# Altium PCB MEA_60_6MIL.PcbDoc
Units mil, origin at the board's own origin, x right, y up, seen from the top; angles counter-clockwise.
Board outline 2200 x 2200 mil, 2 copper layers (Top Copper Layer, Bottom Copper Layer), stack 42.126 mil thick; 1 components, 68 nets, 136 pads, 68 vias.
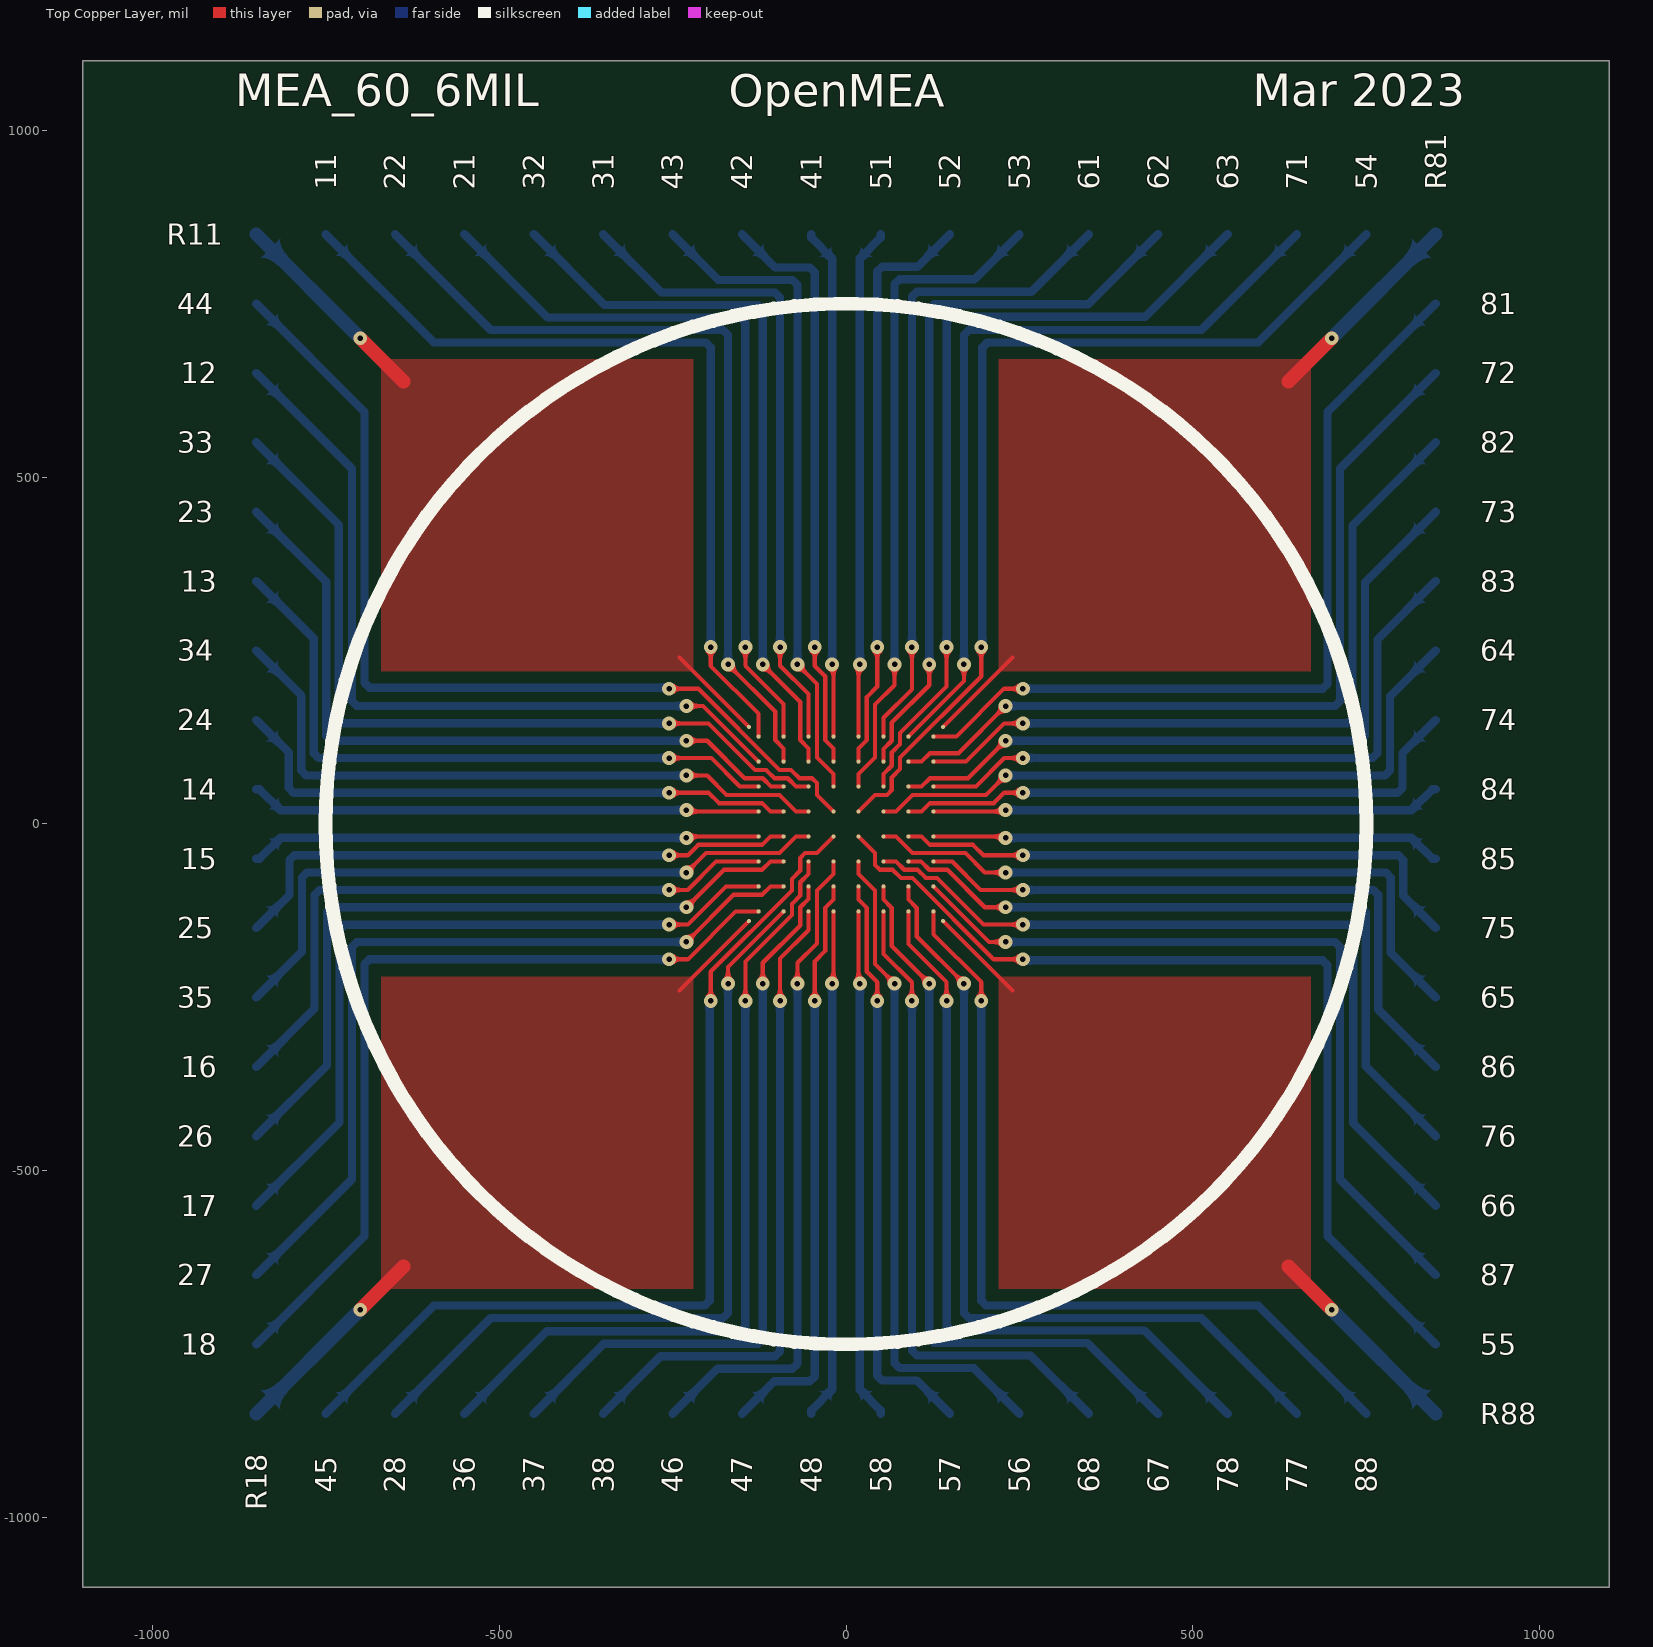
[diagram p0: Top Copper Layer view]
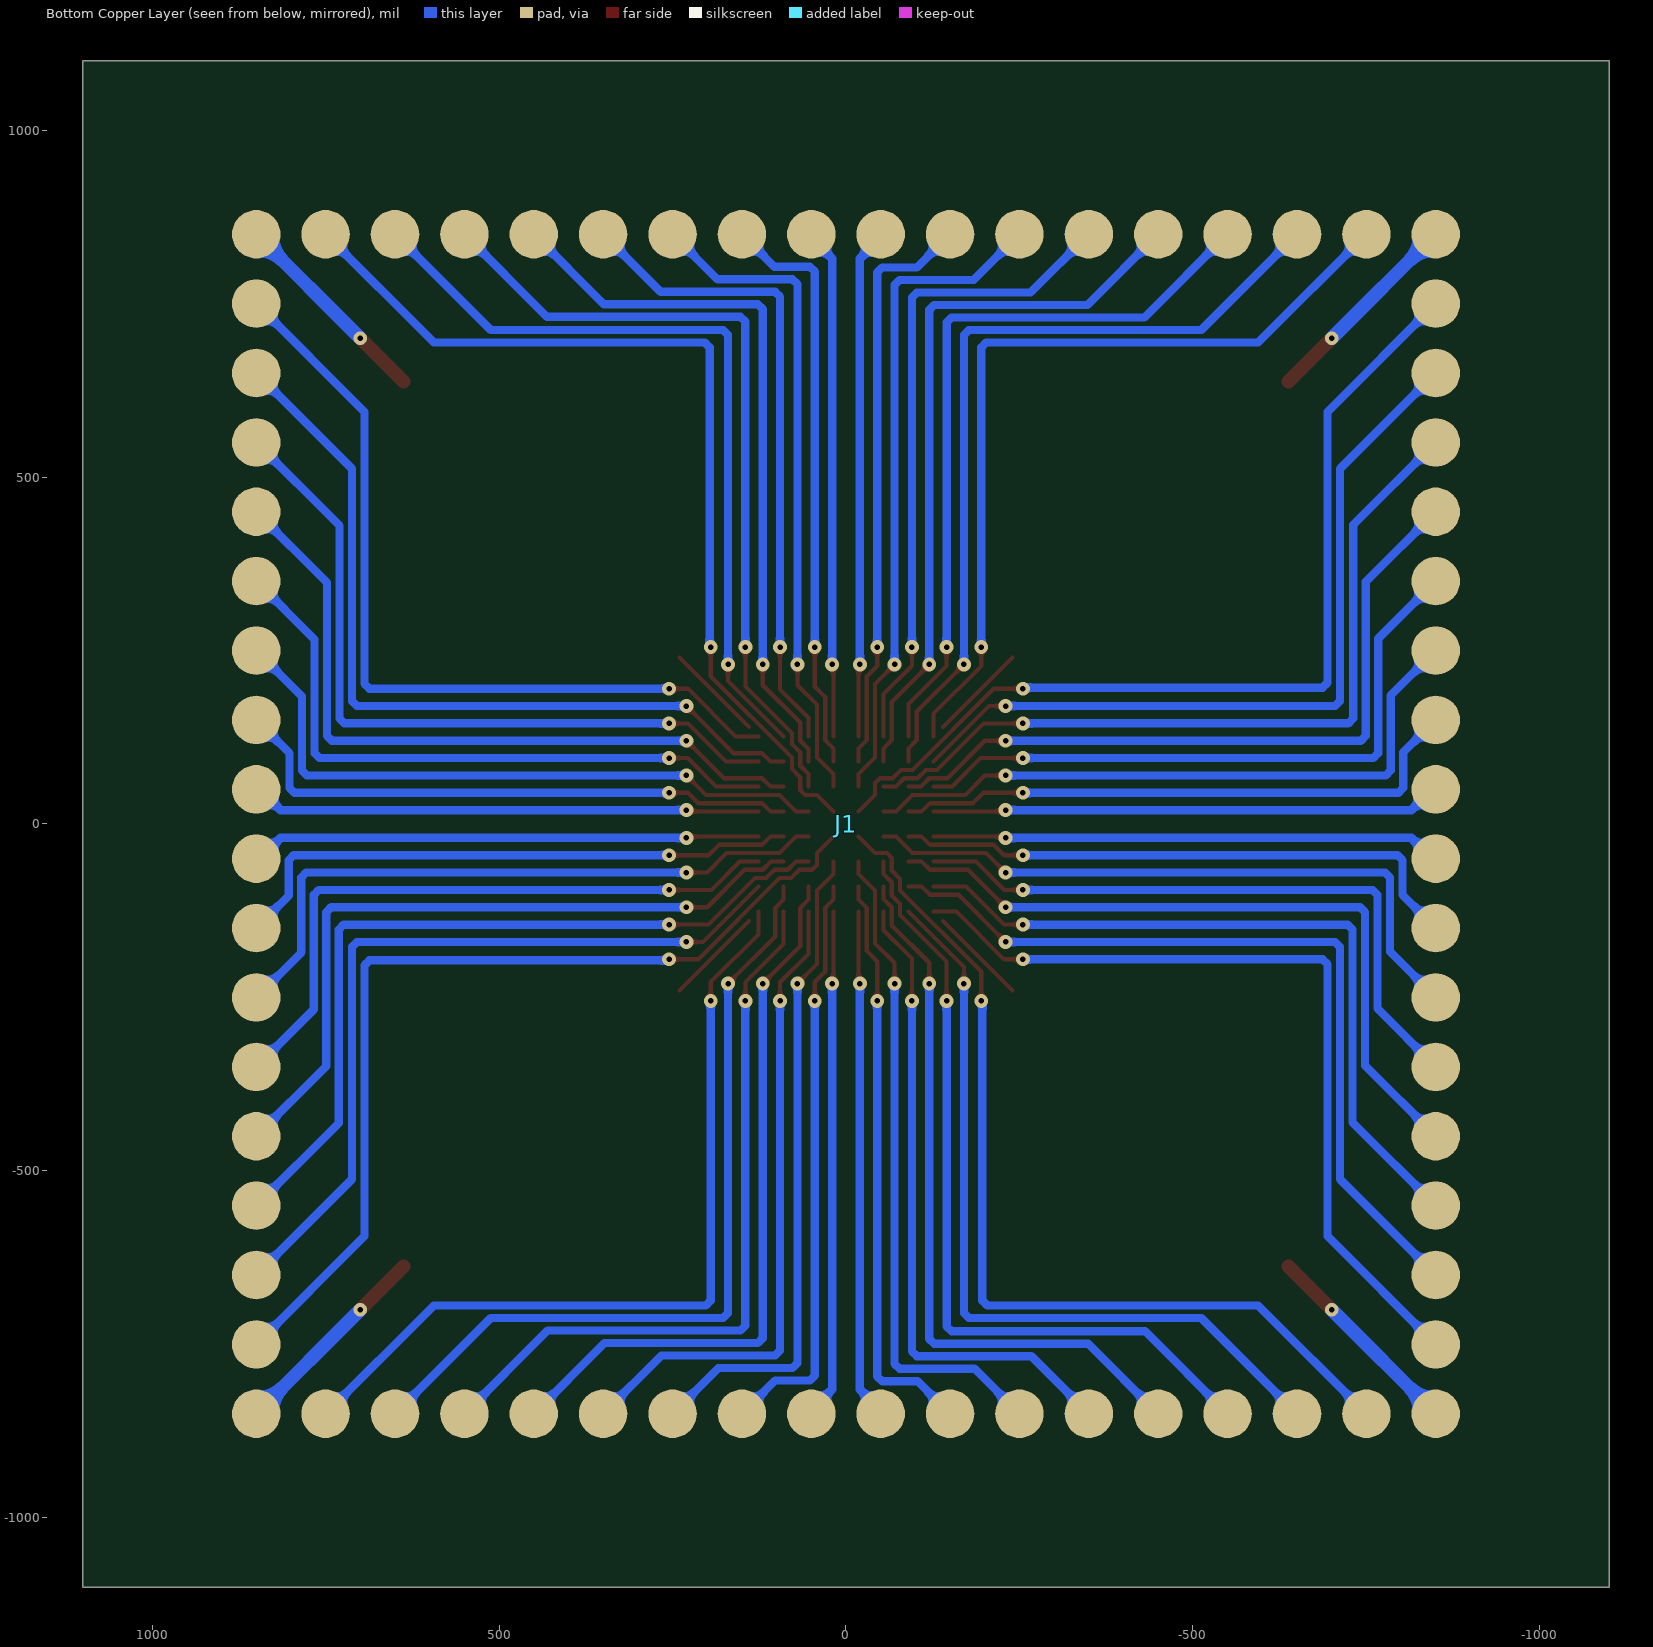
[diagram p1: Bottom Copper Layer view, seen from below]

## Layer stack, top to bottom
Top Solder: solder mask 0.394, Solder Resist, Dk 3.5
Top Copper Layer: signal copper 1.378
Dielectric 1: core 39.37, FR-4, Dk 4.2
Bottom Copper Layer: signal copper 1.378
Bottom Solder: solder mask 0.394, Solder Resist, Dk 3.5

## Board outline
-1100,1100 -1100,-1100 1100,-1100 1100,1100

## Design rules (kind name [scope] priority, off if disabled: settings)
BoardOutlineClearance [All] p1: gap=15.75 ignorepadtopadclearanceinfootprint=FALSE
Clearance [All] p1: gap=6 ignorepadtopadclearanceinfootprint=TRUE
ComponentClearance [All] p1: gap=5.91 collisioncheckmode=3 verticalgap=5.91 showdistances=FALSE
HoleSize [All] p1: absolutevalues=TRUE maxlimit=30 minlimit=8 maxpercent=80.000 minpercent=20.000
HoleToHoleClearance [All] p1: gap=17.72 allowstackedmicrovias=TRUE
MinimumAnnularRing [All] p1: minimumring=6
MinimumSolderMaskSliver [All] p1: minsoldermaskwidth=5.91
PlaneClearance [All] p1: clearance=5.91
PlaneConnect [All] p1: planeconnectstyle=Relief reliefexpansion=9.84 reliefentries=4 reliefconductorwidth=5.91 reliefairgap=5.91
PolygonConnect [All] p1: connectstyle=Direct reliefconductorwidth=5.91 reliefentries=4 polygonreliefangle="90 Angle" airgapwidth=5.91
RoomDefinition MEA_60_6MIL [InComponentClass('MEA_60_6MIL')] p1 off: confinementstyle=ConfineIn formatcopy=TRUE lockcomponents=FALSE outline -972,-977.13 1028,-977.13 1028,22.87 -972,22.87
RoutingVias [All] p1: holewidth=8 width=20 viastyle="Through Hole" minholewidth=8 minwidth=20 maxholewidth=15.75 maxwidth=31.5
SilkToSilkClearance [All] p1: silktosilkclearance=7.87
SilkToSolderMaskClearance [IsPad] p1: minsilkscreentomaskgap=7.87 clearancetoexposedcopper=TRUE
SolderMaskExpansion [All] p1: expansion=4 istentingtop=FALSE
Width [All] p1: maxlimit=20 minlimit=6 preferedwidth=6
22 further rules are at their usual default settings.

## Components (designator, comment, footprint, x,y, rotation, side; value= is the part's Value field where it differs from the comment)
J1 "Pogo_Pins_64_4" Pogo_Pins_64_4 0,0 r0 top locked

## Footprints (in the part's own frame and the unit in brackets; to place one, negate y for a bottom-side part, rotate by r counter-clockwise, add the part's x,y. Pads: shape width x height; smd on the part's side, far side on the other; paste and mask are expansions set on the pad)
Pogo_Pins_64_4 [mil]
  round 70 smd far side: 11(-750,850) 12(-850,650) 13(-850,350) 14(-850,50) 15(-850,-50) 16(-850,-350) 17(-850,-550) 18(-850,-750) 21(-550,850) 22(-650,850) 23(-850,450) 24(-850,150) 25(-850,-150) 26(-850,-450) 27(-850,-650) 28(-650,-850) 31(-350,850) 32(-450,850) 33(-850,550) 34(-850,250) 35(-850,-250) 36(-550,-850) 37(-450,-850) 38(-350,-850) 41(-50,850) 42(-150,850) 43(-250,850) 44(-850,750) 45(-750,-850) 46(-250,-850) 47(-150,-850) 48(-50,-850) 51(50,850) 52(150,850) 53(250,850) 54(750,850) 55(850,-750) 56(250,-850) 57(150,-850) 58(50,-850) 61(350,850) 62(450,850) 63(550,850) 64(850,250) 65(850,-250) 66(850,-550) 67(450,-850) 68(350,-850) 71(650,850) 72(850,650) 73(850,450) 74(850,150) 75(850,-150) 76(850,-450) 77(650,-850) 78(550,-850) 81(850,750) 82(850,550) 83(850,350) 84(850,50) 85(850,-50) 86(850,-350) 87(850,-650) 88(750,-850) R11(-850,850) R18(-850,-850) R81(850,850) R88(850,-850)

## Part data
J1: "Pogo pins, 64 recording electrodes, 4 reference electrodes"

## Free pads (board coordinates)
  round 6 smd mask+0: 1(-140,-140) 1(-140,140) 1(-126,-126) 1(-126,-90) 1(-126,-54) 1(-126,-18) 1(-126,18) 1(-126,54) 1(-126,90) 1(-126,126) 1(-90,-126) 1(-90,-90) 1(-90,-54) 1(-90,-18) 1(-90,18) 1(-90,54) 1(-90,90) 1(-90,126) 1(-54,-126) 1(-54,-90) 1(-54,-54) 1(-54,-18) 1(-54,18) 1(-54,54) 1(-54,90) 1(-54,126) 1(-18,-126) 1(-18,-90) 1(-18,-54) 1(-18,-18) 1(-18,18) 1(-18,54) 1(-18,90) 1(-18,126) 1(18,-126) 1(18,-90) 1(18,-54) 1(18,-18) 1(18,18) 1(18,54) 1(18,90) 1(18,126) 1(54,-126) 1(54,-90) 1(54,-54) 1(54,-18) 1(54,18) 1(54,54) 1(54,90) 1(54,126) 1(90,-126) 1(90,-90) 1(90,-54) 1(90,-18) 1(90,18) 1(90,54) 1(90,90) 1(90,126) 1(126,-126) 1(126,-90) 1(126,-54) 1(126,-18) 1(126,18) 1(126,54) 1(126,90) 1(126,126) 1(140,-140) 1(140,140)

## Via types
v1: diameter 20, hole 8, Top Copper Layer to Bottom Copper Layer, tented both sides, 68 vias

## Nets (pads, with @x,y where several pads share a name; then routed paths per layer and width w, separated by ;. In a path a pad name is that pad's centre, name@x,y a point inside that pad or via, vN(x,y) a via of type N, cw(c..) or ccw(c..) an arc to the next point about the centre after c; other vN are vias at no path point)
E11: J1.11 pad.1@-126,126 | length 1212.1
  Top Copper Layer w6: v1(-195,255) -195,228 -126,159 pad.1@-126,126
  Bottom Copper Layer w12: J1.11 -594,694 -202.03,694 -195,686.97 v1(-195,255)
E12: J1.12 pad.1@-126,90 | length 1152.2
  Top Copper Layer w6: v1(-230,170) -206.16,170 -126.16,90 pad.1@-126,90
  Bottom Copper Layer w12: J1.12 -712,512 -712,177.03 -704.97,170 v1(-230,170)
E13: J1.13 pad.1@-126,54 | length 943.2
  Top Copper Layer w6: v1(-255,95) -194.11,95 -153.11,54 pad.1@-126,54
  Bottom Copper Layer w12: J1.13 -767,267 -767,102.03 -759.97,95 v1(-255,95)
E14: J1.14 pad.1@-126,18 | length 735.3
  Top Copper Layer w6: v1(-230,20) -228,18 pad.1@-126,18
  Bottom Copper Layer w12: J1.14 -844.99,50 -814.99,20 -276,20 ; -274,20 v1(-230,20)
E15: J1.15 pad.1@-126,-18 | length 737.3
  Top Copper Layer w6: v1(-230,-20) -228,-18 pad.1@-126,-18
  Bottom Copper Layer w12: J1.15 -844.99,-50 -814.99,-20 v1(-230,-20)
E16: J1.16 pad.1@-126,-54 | length 942.7
  Top Copper Layer w6: v1(-255,-95) -228.13,-95 -187.13,-54 pad.1@-126,-54
  Bottom Copper Layer w12: J1.16 -766,-266 -766,-102.03 -758.97,-95 v1(-255,-95)
E17: J1.17 pad.1@-126,-90 | length 1077.4
  Top Copper Layer w6: v1(-255,-145) -228,-145 -173,-90 pad.1@-126,-90
  Bottom Copper Layer w12: J1.17 -730,-430 -730,-152.03 -722.97,-145 v1(-255,-145)
E18: J1.18 pad.1@-126,-126 | length 1212.1
  Top Copper Layer w6: v1(-255,-195) -228,-195 -159,-126 pad.1@-126,-126
  Bottom Copper Layer w12: J1.18 -694,-594 -694,-202.03 -686.97,-195 v1(-255,-195)
E21: J1.21 pad.1@-90,126 | length 1077.4
  Top Copper Layer w6: v1(-145,255) -145,228 -90,173 pad.1@-90,126
  Bottom Copper Layer w12: J1.21 -430,730 -152.03,730 -145,722.97 v1(-145,255)
E22: J1.22 pad.1@-90,90 | length 1188.2
  Top Copper Layer w6: v1(-170,230) -102,162 -102,121.03 -90,109.03 pad.1@-90,90
  Bottom Copper Layer w12: J1.22 -512,712 -177.03,712 -170,704.97 v1(-170,230)
E23: J1.23 pad.1@-90,54 | length 1054.1
  Top Copper Layer w6: v1(-230,120) -200,120 -146,66 -120,66 -108,54 pad.1@-90,54
  Bottom Copper Layer w12: J1.23 -749,349 -749,127.03 -741.97,120 v1(-230,120)
E24: J1.24 pad.1@-90,18 | length 844.5
  Top Copper Layer w6: v1(-255,45) -198.13,45 -183.13,30 -130.97,30 -121.03,30 -109.03,18 pad.1@-90,18
  Bottom Copper Layer w12: J1.24 -803,103 -803,52.03 -795.97,45 v1(-255,45)
E25: J1.25 pad.1@-90,-18 | length 843.9
  Top Copper Layer w6: v1(-255,-45) -228,-45 -213,-30 -121,-30 -109,-18 pad.1@-90,-18
  Bottom Copper Layer w12: J1.25 -802,-102 -802,-52.03 -794.97,-45 v1(-255,-45)
E26: J1.26 pad.1@-90,-54 | length 1053.5
  Top Copper Layer w6: v1(-230,-120) -176,-66 -121,-66 -109,-54 pad.1@-90,-54
  Bottom Copper Layer w12: J1.26 -748,-348 -748,-127.03 -740.97,-120 v1(-230,-120)
E27: J1.27 pad.1@-90,-90 | length 1188.2
  Top Copper Layer w6: v1(-230,-170) -162,-102 -121.03,-102 -109.03,-90 pad.1@-90,-90
  Bottom Copper Layer w12: J1.27 -712,-512 -712,-177.03 -704.97,-170 v1(-230,-170)
E28: J1.28 pad.1@-90,-126 | length 1152.2
  Top Copper Layer w6: v1(-170,-230) -170,-206.16 -90,-126.16 pad.1@-90,-126
  Bottom Copper Layer w12: J1.28 -512,-712 -177.03,-712 -170,-704.97 v1(-170,-230)
E31: J1.31 pad.1@-54,126 | length 942.7
  Top Copper Layer w6: v1(-95,255) -95,228.13 -54,187.13 pad.1@-54,126
  Bottom Copper Layer w12: J1.31 -266,766 -102.03,766 -95,758.97 v1(-95,255)
E32: J1.32 pad.1@-54,90 | length 1053.5
  Top Copper Layer w6: v1(-120,230) -66,176 -66,121 -54,109 pad.1@-54,90
  Bottom Copper Layer w12: J1.32 -348,748 -127.03,748 -120,740.97 v1(-120,230)
E33: J1.33 pad.1@-54,54 | length 1164.9
  Top Copper Layer w6: v1(-255,145) -198.13,145 -131.13,78 -115.03,78 -103.03,66 -84,66 -72,54 pad.1@-54,54
  Bottom Copper Layer w12: J1.33 -731,431 -731,152.03 -723.97,145 v1(-255,145)
E34: J1.34 pad.1@-54,18 | length 955.3
  Top Copper Layer w6: v1(-230,70) -200,70 -172,42 -96,42 -72,18 pad.1@-54,18
  Bottom Copper Layer w12: J1.34 -785,185 -785,77.03 -777.97,70 v1(-230,70)
E35: J1.35 pad.1@-54,-18 | length 954.8
  Top Copper Layer w6: v1(-230,-70) -202,-42 -116.03,-42 -96,-42 -72,-18 pad.1@-54,-18
  Bottom Copper Layer w12: J1.35 -784,-184 -784,-77.03 -776.97,-70 v1(-230,-70)
E36: J1.36 pad.1@-54,-54 | length 1164.9
  Top Copper Layer w6: v1(-145,-255) -145,-198.13 -78,-131.13 -78,-115.03 -66,-103.03 -66,-84 -54,-72 pad.1@-54,-54
  Bottom Copper Layer w12: J1.36 -431,-731 -152.03,-731 -145,-723.97 v1(-145,-255)
E37: J1.37 pad.1@-54,-90 | length 1054.1
  Top Copper Layer w6: v1(-120,-230) -120,-200 -66,-146 -66,-120 -54,-108 pad.1@-54,-90
  Bottom Copper Layer w12: J1.37 -349,-749 -127.03,-749 -120,-741.97 v1(-120,-230)
E38: J1.38 pad.1@-54,-126 | length 943.2
  Top Copper Layer w6: v1(-95,-255) -95,-194.11 -54,-153.11 pad.1@-54,-126
  Bottom Copper Layer w12: J1.38 -267,-767 -102.03,-767 -95,-759.97 v1(-95,-255)
E41: J1.41 pad.1@-18,126 | length 737.3
  Top Copper Layer w6: v1(-20,230) -18,228 pad.1@-18,126
  Bottom Copper Layer w12: J1.41 -50,844.99 -20,814.99 v1(-20,230)
E42: J1.42 pad.1@-18,90 | length 843.9
  Top Copper Layer w6: v1(-45,255) -45,228 -30,213 -30,121 -18,109 pad.1@-18,90
  Bottom Copper Layer w12: J1.42 -102,802 -52.03,802 -45,794.97 v1(-45,255)
E43: J1.43 pad.1@-18,54 | length 954.8
  Top Copper Layer w6: v1(-70,230) -42,202 -42,116.03 -42,96 -18,72 pad.1@-18,54
  Bottom Copper Layer w12: J1.43 -184,784 -77.03,784 -70,776.97 v1(-70,230)
E44: J1.44 pad.1@-18,18 | length 1373.9
  Top Copper Layer w6: v1(-255,195) -213,195 -96,78 -79.03,78 -67.03,66 -49.03,66 -42,58.97 -42,42 pad.1@-18,18
  Bottom Copper Layer w12: J1.44 -694,594 -694,203.56 -686.97,196.53 -256.53,196.53 v1(-255,195)
E45: J1.45 pad.1@-18,-18 | length 1373.9
  Top Copper Layer w6: v1(-195,-255) -195,-213 -78,-96 -78,-79.03 -66,-67.03 -66,-49.03 -58.97,-42 -42,-42 pad.1@-18,-18
  Bottom Copper Layer w12: J1.45 -594,-694 -203.56,-694 -196.53,-686.97 -196.53,-256.53 v1(-195,-255)
E46: J1.46 pad.1@-18,-54 | length 955.3
  Top Copper Layer w6: v1(-70,-230) -70,-200 -42,-172 -42,-96 -18,-72 pad.1@-18,-54
  Bottom Copper Layer w12: J1.46 -185,-785 -77.03,-785 -70,-777.97 v1(-70,-230)
E47: J1.47 pad.1@-18,-90 | length 844.5
  Top Copper Layer w6: v1(-45,-255) -45,-198.13 -30,-183.13 -30,-130.97 -30,-121.03 -18,-109.03 pad.1@-18,-90
  Bottom Copper Layer w12: J1.47 -103,-803 -52.03,-803 -45,-795.97 v1(-45,-255)
E48: J1.48 pad.1@-18,-126 | length 735.3
  Top Copper Layer w6: v1(-20,-230) -18,-228 pad.1@-18,-126
  Bottom Copper Layer w12: J1.48 -50,-844.99 -20,-814.99 -20,-276 ; -20,-274 v1(-20,-230)
E51: J1.51 pad.1@18,126 | length 735.3
  Top Copper Layer w6: pad.1@18,126 18,228 v1(20,230)
  Bottom Copper Layer w12: v1(20,230) 20,274 ; 20,276 20,814.99 50,844.99 J1.51
E52: J1.52 pad.1@18,90 | length 844.5
  Top Copper Layer w6: pad.1@18,90 18,109.03 30,121.03 30,130.97 30,183.13 45,198.13 v1(45,255)
  Bottom Copper Layer w12: v1(45,255) 45,795.97 52.03,803 103,803 J1.52
E53: J1.53 pad.1@18,54 | length 955.3
  Top Copper Layer w6: pad.1@18,54 18,72 42,96 42,172 70,200 v1(70,230)
  Bottom Copper Layer w12: v1(70,230) 70,777.97 77.03,785 185,785 J1.53
E54: J1.54 pad.1@18,18 | length 1373.9
  Top Copper Layer w6: pad.1@18,18 42,42 58.97,42 66,49.03 66,67.03 78,79.03 78,96 195,213 v1(195,255)
  Bottom Copper Layer w12: v1(195,255) 196.53,256.53 196.53,686.97 203.56,694 594,694 J1.54
E55: J1.55 pad.1@18,-18 | length 1373.9
  Top Copper Layer w6: pad.1@18,-18 42,-42 42,-58.97 49.03,-66 67.03,-66 79.03,-78 96,-78 213,-195 v1(255,-195)
  Bottom Copper Layer w12: v1(255,-195) 256.53,-196.53 686.97,-196.53 694,-203.56 694,-594 J1.55
E56: J1.56 pad.1@18,-54 | length 954.8
  Top Copper Layer w6: pad.1@18,-54 18,-72 42,-96 42,-116.03 42,-202 v1(70,-230)
  Bottom Copper Layer w12: v1(70,-230) 70,-776.97 77.03,-784 184,-784 J1.56
E57: J1.57 pad.1@18,-90 | length 843.9
  Top Copper Layer w6: pad.1@18,-90 18,-109 30,-121 30,-213 45,-228 v1(45,-255)
  Bottom Copper Layer w12: v1(45,-255) 45,-794.97 52.03,-802 102,-802 J1.57
E58: J1.58 pad.1@18,-126 | length 737.3
  Top Copper Layer w6: pad.1@18,-126 18,-228 v1(20,-230)
  Bottom Copper Layer w12: v1(20,-230) 20,-814.99 50,-844.99 J1.58
E61: J1.61 pad.1@54,126 | length 943.2
  Top Copper Layer w6: pad.1@54,126 54,153.11 95,194.11 v1(95,255)
  Bottom Copper Layer w12: v1(95,255) 95,759.97 102.03,767 267,767 J1.61
E62: J1.62 pad.1@54,90 | length 1054.1
  Top Copper Layer w6: pad.1@54,90 54,108 66,120 66,146 120,200 v1(120,230)
  Bottom Copper Layer w12: v1(120,230) 120,741.97 127.03,749 349,749 J1.62
E63: J1.63 pad.1@54,54 | length 1164.9
  Top Copper Layer w6: pad.1@54,54 54,72 66,84 66,103.03 78,115.03 78,131.13 145,198.13 v1(145,255)
  Bottom Copper Layer w12: v1(145,255) 145,723.97 152.03,731 431,731 J1.63
E64: J1.64 pad.1@54,18 | length 954.8
  Top Copper Layer w6: pad.1@54,18 72,18 96,42 116.03,42 202,42 v1(230,70)
  Bottom Copper Layer w12: v1(230,70) 776.97,70 784,77.03 784,184 J1.64
E65: J1.65 pad.1@54,-18 | length 955.3
  Top Copper Layer w6: pad.1@54,-18 72,-18 96,-42 172,-42 200,-70 v1(230,-70)
  Bottom Copper Layer w12: v1(230,-70) 777.97,-70 785,-77.03 785,-185 J1.65
E66: J1.66 pad.1@54,-54 | length 1164.9
  Top Copper Layer w6: pad.1@54,-54 72,-54 84,-66 103.03,-66 115.03,-78 131.13,-78 198.13,-145 v1(255,-145)
  Bottom Copper Layer w12: v1(255,-145) 723.97,-145 731,-152.03 731,-431 J1.66
E67: J1.67 pad.1@54,-90 | length 1053.5
  Top Copper Layer w6: pad.1@54,-90 54,-109 66,-121 66,-176 v1(120,-230)
  Bottom Copper Layer w12: v1(120,-230) 120,-740.97 127.03,-748 348,-748 J1.67
E68: J1.68 pad.1@54,-126 | length 942.7
  Top Copper Layer w6: pad.1@54,-126 54,-187.13 95,-228.13 v1(95,-255)
  Bottom Copper Layer w12: v1(95,-255) 95,-758.97 102.03,-766 266,-766 J1.68
E71: J1.71 pad.1@90,126 | length 1152.2
  Top Copper Layer w6: pad.1@90,126 90,126.16 170,206.16 v1(170,230)
  Bottom Copper Layer w12: v1(170,230) 170,704.97 177.03,712 512,712 J1.71
E72: J1.72 pad.1@90,90 | length 1188.2
  Top Copper Layer w6: pad.1@90,90 109.03,90 121.03,102 162,102 v1(230,170)
  Bottom Copper Layer w12: v1(230,170) 704.97,170 712,177.03 712,512 J1.72
E73: J1.73 pad.1@90,54 | length 1053.5
  Top Copper Layer w6: pad.1@90,54 109,54 121,66 176,66 v1(230,120)
  Bottom Copper Layer w12: v1(230,120) 740.97,120 748,127.03 748,348 J1.73
E74: J1.74 pad.1@90,18 | length 843.9
  Top Copper Layer w6: pad.1@90,18 109,18 121,30 213,30 228,45 v1(255,45)
  Bottom Copper Layer w12: v1(255,45) 794.97,45 802,52.03 802,102 J1.74
E75: J1.75 pad.1@90,-18 | length 844.5
  Top Copper Layer w6: pad.1@90,-18 109.03,-18 121.03,-30 130.97,-30 183.13,-30 198.13,-45 v1(255,-45)
  Bottom Copper Layer w12: v1(255,-45) 795.97,-45 803,-52.03 803,-103 J1.75
E76: J1.76 pad.1@90,-54 | length 1054.1
  Top Copper Layer w6: pad.1@90,-54 108,-54 120,-66 146,-66 200,-120 v1(230,-120)
  Bottom Copper Layer w12: v1(230,-120) 741.97,-120 749,-127.03 749,-349 J1.76
E77: J1.77 pad.1@90,-90 | length 1188.2
  Top Copper Layer w6: pad.1@90,-90 90,-109.03 102,-121.03 102,-162 v1(170,-230)
  Bottom Copper Layer w12: v1(170,-230) 170,-704.97 177.03,-712 512,-712 J1.77
E78: J1.78 pad.1@90,-126 | length 1077.4
  Top Copper Layer w6: pad.1@90,-126 90,-173 145,-228 v1(145,-255)
  Bottom Copper Layer w12: v1(145,-255) 145,-722.97 152.03,-730 430,-730 J1.78
E81: J1.81 pad.1@126,126 | length 1212.1
  Top Copper Layer w6: pad.1@126,126 159,126 228,195 v1(255,195)
  Bottom Copper Layer w12: v1(255,195) 686.97,195 694,202.03 694,594 J1.81
E82: J1.82 pad.1@126,90 | length 1077.4
  Top Copper Layer w6: pad.1@126,90 173,90 228,145 v1(255,145)
  Bottom Copper Layer w12: v1(255,145) 722.97,145 730,152.03 730,430 J1.82
E83: J1.83 pad.1@126,54 | length 942.7
  Top Copper Layer w6: pad.1@126,54 187.13,54 228.13,95 v1(255,95)
  Bottom Copper Layer w12: v1(255,95) 758.97,95 766,102.03 766,266 J1.83
E84: J1.84 pad.1@126,18 | length 737.3
  Top Copper Layer w6: pad.1@126,18 228,18 v1(230,20)
  Bottom Copper Layer w12: v1(230,20) 814.99,20 844.99,50 J1.84
E85: J1.85 pad.1@126,-18 | length 735.3
  Top Copper Layer w6: pad.1@126,-18 228,-18 v1(230,-20)
  Bottom Copper Layer w12: v1(230,-20) 274,-20 ; 276,-20 814.99,-20 844.99,-50 J1.85
E86: J1.86 pad.1@126,-54 | length 943.2
  Top Copper Layer w6: pad.1@126,-54 153.11,-54 194.11,-95 v1(255,-95)
  Bottom Copper Layer w12: v1(255,-95) 759.97,-95 767,-102.03 767,-267 J1.86
E87: J1.87 pad.1@126,-90 | length 1152.2
  Top Copper Layer w6: pad.1@126,-90 126.16,-90 206.16,-170 v1(230,-170)
  Bottom Copper Layer w12: v1(230,-170) 704.97,-170 712,-177.03 712,-512 J1.87
E88: J1.88 pad.1@126,-126 | length 1212.1
  Top Copper Layer w6: pad.1@126,-126 126,-159 195,-228 v1(195,-255)
  Bottom Copper Layer w12: v1(195,-255) 195,-686.97 202.03,-694 594,-694 J1.88
R11: J1.R11 pad.1@-140,140 | length 441.2
  Top Copper Layer w6: -240,240 pad.1@-140,140
  Top Copper Layer w20: v1(-700,700) -638,638
  Bottom Copper Layer w20: J1.R11 v1(-700,700)
R18: J1.R18 pad.1@-140,-140 | length 441.2
  Top Copper Layer w6: -240,-240 pad.1@-140,-140
  Top Copper Layer w20: v1(-700,-700) -638,-638
  Bottom Copper Layer w20: J1.R18 v1(-700,-700)
R81: J1.R81 pad.1@140,140 | length 441.2
  Top Copper Layer w6: pad.1@140,140 240,240
  Top Copper Layer w20: 638,638 v1(700,700)
  Bottom Copper Layer w20: v1(700,700) J1.R81
R88: J1.R88 pad.1@140,-140 | length 441.2
  Top Copper Layer w6: pad.1@140,-140 240,-240
  Top Copper Layer w20: 638,-638 v1(700,-700)
  Bottom Copper Layer w20: v1(700,-700) J1.R88

## Polygon pours and split planes (outlines as drawn)
R81 on Top Copper Layer "R81_L01_P007" (solid, pour order 7): 670,670 220,670 220,220 670,220
R88 on Top Copper Layer "R88_L01_P006" (solid, pour order 6): 670,-670 670,-220 220,-220 220,-670
R18 on Top Copper Layer "R18_L01_P005" (solid, pour order 5): -670,-670 -220,-670 -220,-220 -670,-220
R11 on Top Copper Layer "R11_L01_P004" (solid, pour order 4): -670,670 -670,220 -220,220 -220,670
no net on Top Solder "R81_L01_P001" (solid): 670,670 220,670 220,220 670,220
no net on Top Solder "R81_L01_P001" (solid): 670,-670 670,-220 220,-220 220,-670
no net on Top Solder "R81_L01_P001" (solid): -670,-670 -220,-670 -220,-220 -670,-220
no net on Top Solder "R81_L01_P001" (solid): -670,670 -670,220 -220,220 -220,670

## Silkscreen, mask and mechanical layers (free items; w line width, h text height)
Top Overlay:
  circle w20: c0,0 r750
  text "MEA_60_6MIL" at -880,1018.57 h80
  text "Mar 2023" at 586.15,1018.57 h80
  text "OpenMEA" at -169.28,1017.83 h80

## Text inside footprints (layer, text, board x,y; h text height)
J1: Top Overlay "R11" at -979.03,835 h30; Top Overlay "R81" at 864.99,914.06 h30 r90; Top Overlay "45" at -735,-964.04 h30 r90; Top Overlay "44" at -964.04,735 h30; Top Overlay "12" at -959.04,635 h30; Top Overlay "33" at -964.04,535 h30; Top Overlay "23" at -964.04,435 h30; Top Overlay "13" at -959.04,335 h30; Top Overlay "34" at -964.04,235 h30; Top Overlay "24" at -964.04,135 h30; Top Overlay "14" at -959.04,35 h30; Top Overlay "15" at -959.04,-65 h30; Top Overlay "25" at -964.04,-165 h30; Top Overlay "35" at -964.04,-265 h30; Top Overlay "16" at -959.04,-365 h30; Top Overlay "26" at -964.04,-465 h30; Top Overlay "17" at -959.04,-565 h30; Top Overlay "27" at -964.04,-665 h30; Top Overlay "18" at -959.04,-765 h30; Top Overlay "81" at 914.06,735 h30; Top Overlay "72" at 914.06,635 h30; Top Overlay "82" at 914.06,535 h30; Top Overlay "73" at 914.06,435 h30; Top Overlay "83" at 914.06,335 h30; Top Overlay "64" at 914.06,235 h30; Top Overlay "74" at 914.06,135 h30; Top Overlay "84" at 914.06,35 h30; Top Overlay "85" at 914.06,-65 h30; Top Overlay "75" at 914.06,-165 h30; Top Overlay "65" at 914.06,-265 h30; Top Overlay "86" at 914.06,-365 h30; Top Overlay "76" at 914.06,-465 h30; Top Overlay "66" at 914.06,-565 h30; Top Overlay "87" at 914.06,-665 h30; Top Overlay "28" at -635,-964.04 h30 r90; Top Overlay "36" at -535,-964.04 h30 r90; Top Overlay "37" at -435,-964.04 h30 r90; Top Overlay "38" at -335,-964.04 h30 r90; Top Overlay "46" at -235,-964.04 h30 r90; Top Overlay "47" at -135,-964.04 h30 r90; Top Overlay "48" at -35,-964.04 h30 r90; Top Overlay "58" at 65,-964.04 h30 r90; Top Overlay "57" at 165,-964.04 h30 r90; Top Overlay "56" at 265,-964.04 h30 r90; Top Overlay "68" at 365,-964.04 h30 r90; Top Overlay "67" at 465,-964.04 h30 r90; Top Overlay "78" at 565,-964.04 h30 r90; Top Overlay "77" at 665,-964.04 h30 r90; Top Overlay "88" at 765,-964.04 h30 r90; Top Overlay "11" at -735,914.05 h30 r90; Top Overlay "22" at -635,914.05 h30 r90; Top Overlay "21" at -535,914.05 h30 r90; Top Overlay "32" at -435,914.06 h30 r90; Top Overlay "31" at -335,914.05 h30 r90; Top Overlay "43" at -235,914.06 h30 r90; Top Overlay "42" at -135,914.06 h30 r90; Top Overlay "41" at -35,914.06 h30 r90; Top Overlay "51" at 65,914.06 h30 r90; Top Overlay "52" at 164.99,914.06 h30 r90; Top Overlay "53" at 264.99,914.06 h30 r90; Top Overlay "61" at 365,914.06 h30 r90; Top Overlay "62" at 464.99,914.06 h30 r90; Top Overlay "63" at 564.99,914.06 h30 r90; Top Overlay "71" at 665,914.06 h30 r90; Top Overlay "55" at 914.06,-765 h30; Top Overlay "54" at 764.99,914.06 h30 r90; Top Overlay "R88" at 914.06,-865 h30; Top Overlay "R18" at -835,-989.03 h30 r90